# EAGLE board reefingBrd (EAGLE 9.6.2)
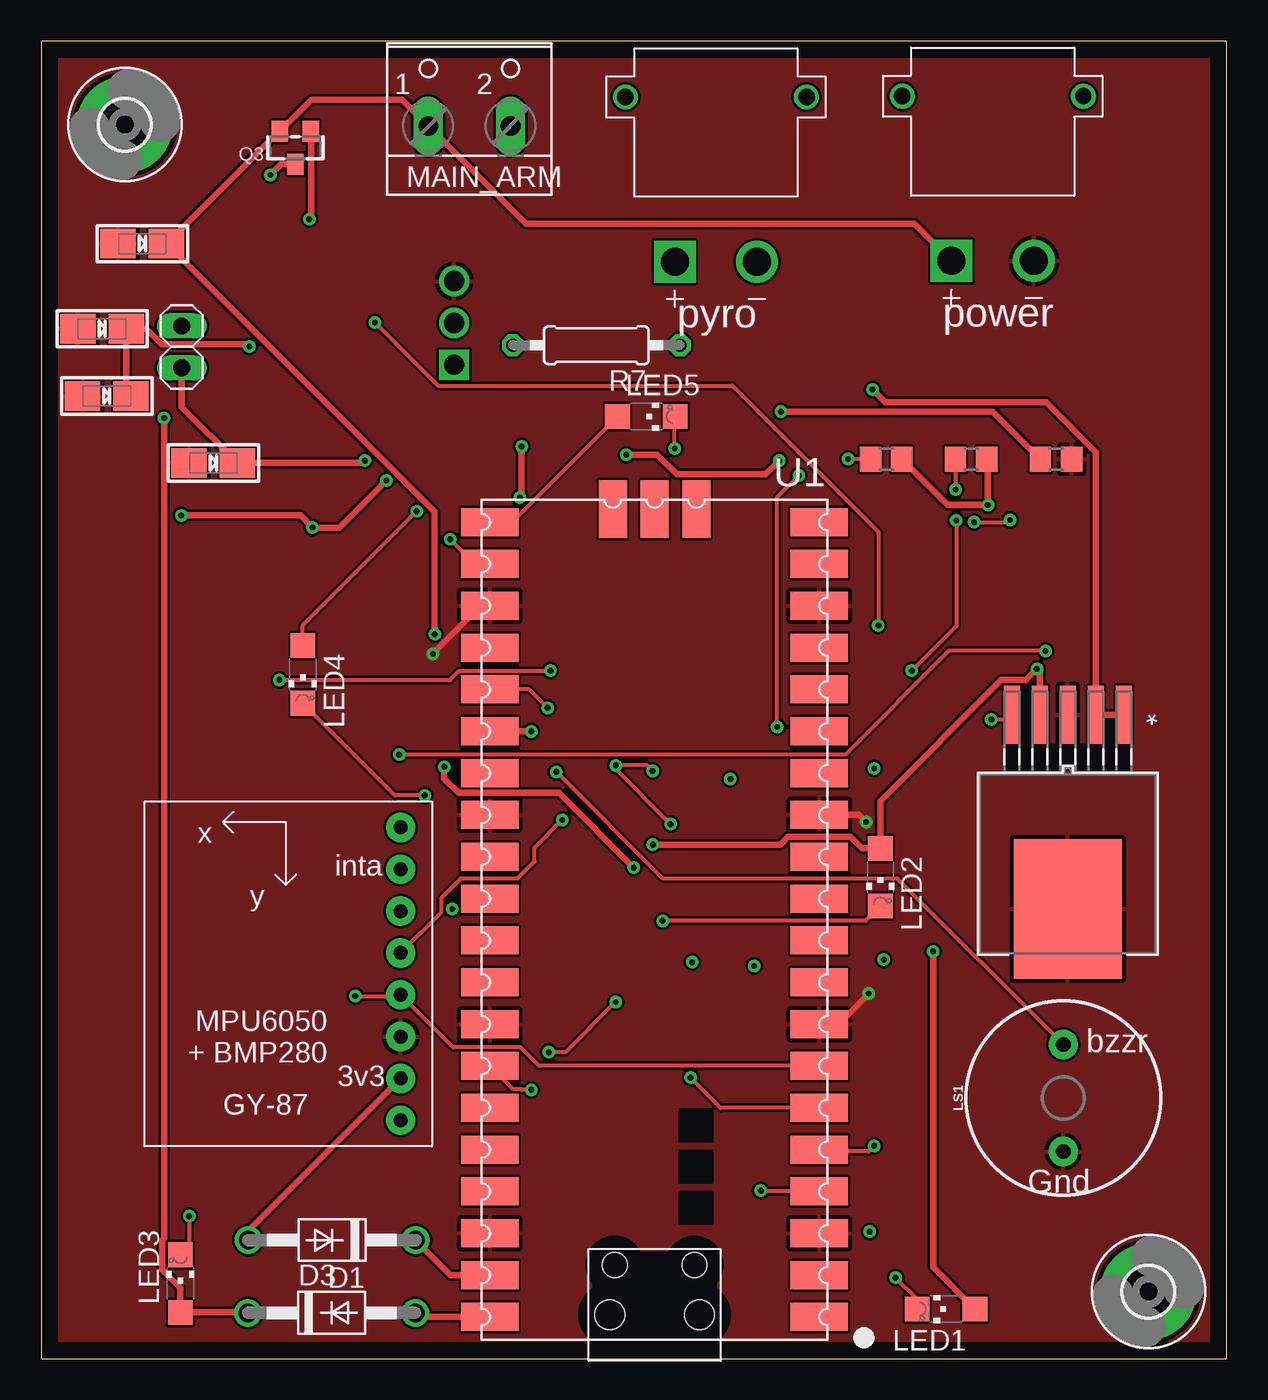
[diagram p0: board, top side]
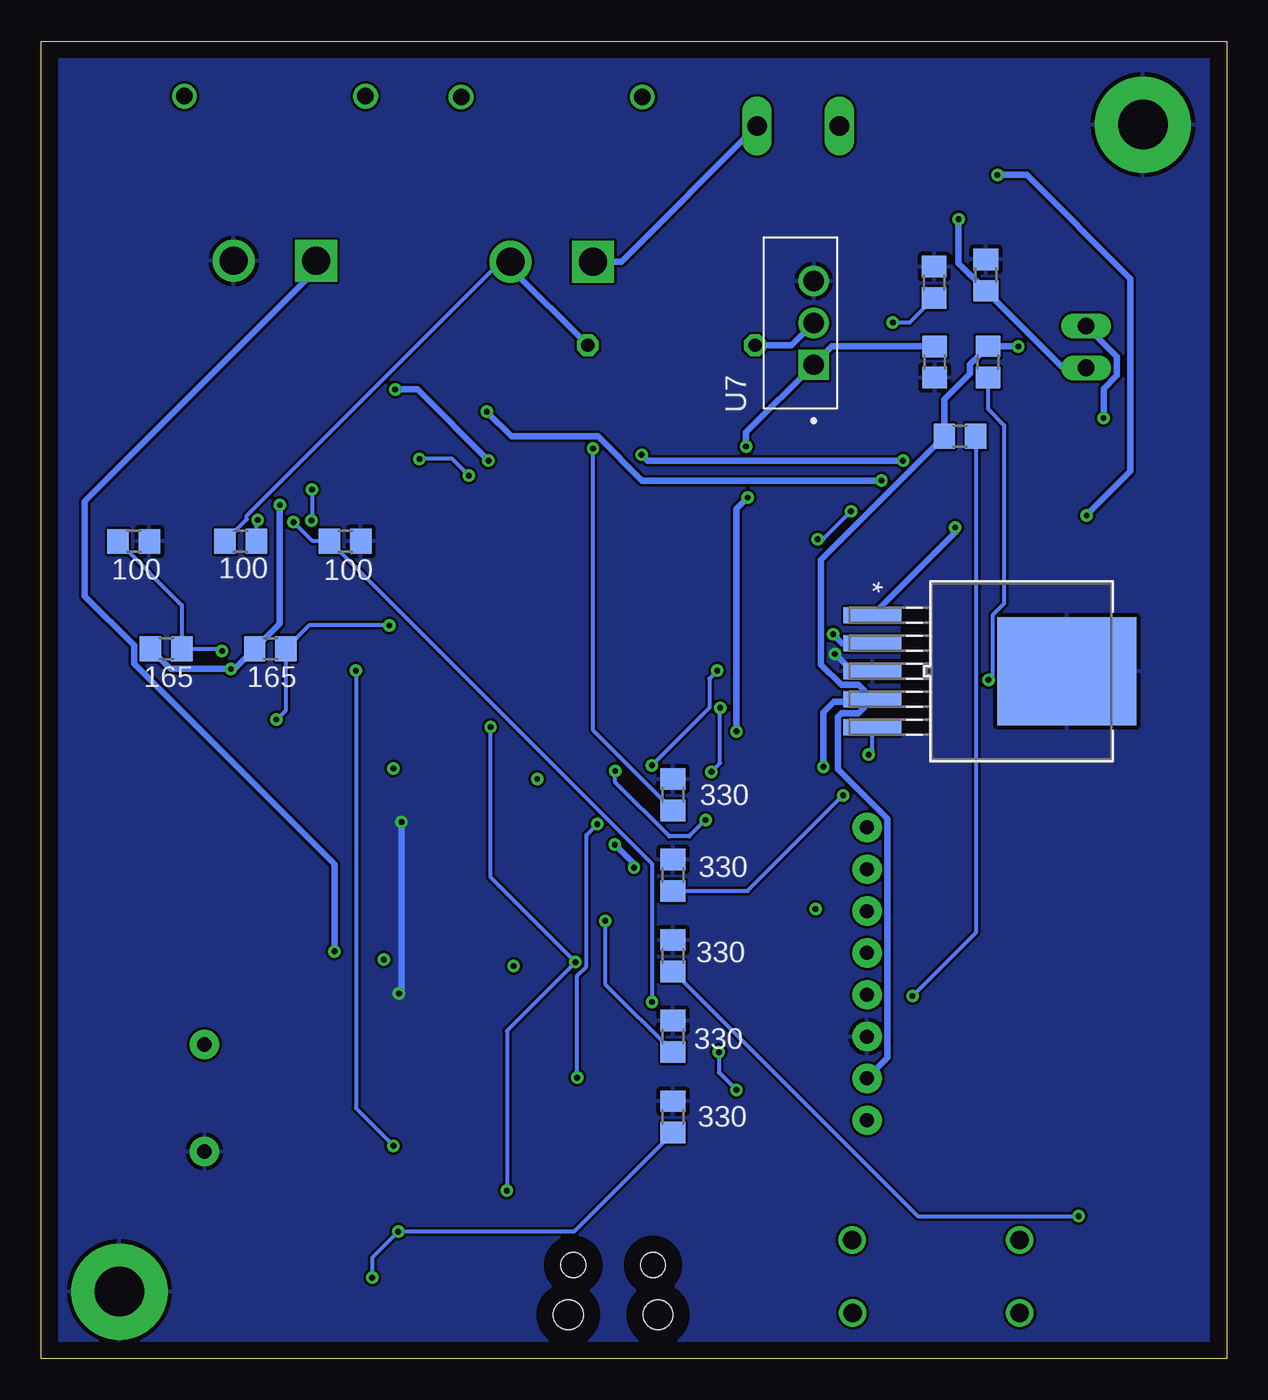
[diagram p1: board, bottom side, seen from below]

Size 72 x 80 mm. Coordinates in mm from the lower left corner, seen from the top.
Outline: 0,0 72,0 72,80 0,80 0,0
Copper layers (1*16): Top 0.035mm / dielectric 1.5mm / Bottom 0.035mm
Design rules "default": minimum track width 6mil, minimum drill 0.35mm, track to track 6mil, track to pad 6mil, pad to pad 6mil, via to via 6mil, smd to smd 6mil, copper to edge 40mil, drill to drill 6mil, minimum pad ring 10mil, minimum via ring 8mil, stop-mask expansion 4mil, vias tented up to drill 0mil, thermal gap 10mil

## Footprints (pad centres in the part's own frame; a part is rotated, then mirrored left to right if it is on the bottom)
EIA3216-18/A-W = smd 2.15 x 1.8: + 1.475,0; - -1.475,0
DO41-10 = drill 1.118: A 5.08,0; C -5.08,0
3,0-PAD = drill 3 pad 5.842: B3,0 0,0
1X02 = drill 1.016 long: 1 -1.27,0; 2 1.27,0
CHIPLED_1206 = smd 1.5 x 1.5: A 0,-1.75; C 0,1.75
BUZZER-12MM = drill 0.9 pad 1.778: + 3.25,0; - -3.25,0
W237-102 = drill 1.194 long: 1 -2.5,-1.27; 2 2.5,-1.27
AMASS_XT30PW-M = drill 1.7: N 2.5,-10 | drill 1.7 square: P -2.5,-10 | drill 1: S1 5.5,0; S2 -5.5,0
SOT23-WIDE = smd 1 x 1.27: 1 -0.95,-1; 2 0.95,-1; 3 0,1
R0805 = smd 1.3 x 1.5: 1 -0.95,0; 2 0.95,0
0207/10 = drill 0.813 octagon: 1 -5.08,0; 2 5.08,0
PICO-PKG-SMD = smd 3.5 x 1.7: P$1 -10,24.13; P$2 -10,21.59; P$3 -10,19.05; P$4 -10,16.51; P$5 -10,13.97; P$6 -10,11.43; P$7 -10,8.89; P$8 -10,6.35; P$9 -10,3.81; P$10 -10,1.27; P$11 -10,-1.27; P$12 -10,-3.81; P$13 -10,-6.35; P$14 -10,-8.89; P$15 -10,-11.43; P$16 -10,-13.97; P$17 -10,-16.51; P$18 -10,-19.05; P$19 -10,-21.59; P$20 -10,-24.13; P$21 10,-24.13; P$22 10,-21.59; P$23 10,-19.05; P$24 10,-16.51; P$25 10,-13.97; P$26 10,-11.43; P$27 10,-8.89; P$28 10,-6.35; P$29 10,-3.81; P$30 10,-1.27; P$31 10,1.27; P$32 10,3.81; P$33 10,6.35; P$34 10,8.89; P$35 10,11.43; P$36 10,13.97; P$37 10,16.51; P$38 10,19.05; P$39 10,21.59; P$40 10,24.13 | smd 1.7 x 3.5: P$41 -2.54,-24.925; P$42 0,-24.925; P$43 2.54,-24.925 | hole 1.8: -2.725,24; 2.725,24 | hole 1.5: -2.425,20.97; 2.425,20.97
GY-521 = drill 0.85 pad 1.778: 3V3 1.905,16.828; DRDY 1.905,1.587; FSYNC 1.905,6.668; GND 1.905,14.287; INTA 1.905,4.128; SCL 1.905,11.748; SDA 1.905,9.207; VCC_IN 1.905,19.367
TO-263-5_MCH = smd 0.965 x 3.505: 1 -3.404,-9.055; 2 -1.702,-9.055; 3 0,-9.055; 4 1.702,-9.055; 5 3.404,-9.055 | smd 6.553 x 8.458: 6 0,2.743
TO254P1054X469X1930-3 = drill 1.23 square: 1 -2.54,-0.81 | drill 1.23: 2 0,-0.81; 3 2.54,-0.81

## Placement (x,y rotation side)
C6  10uF  [EIA3216-18/A-W]  10.46,54.39 0 top
C7  10 uF  [EIA3216-18/A-W]  3.7,62.54 0 top
C11  10uF  [EIA3216-18/A-W]  6.15,67.71 0 top
C12  10 uF  [EIA3216-18/A-W]  3.99,58.45 0 top
D1  1N4004  [DO41-10]  17.66,7.21 180 top
D3  1N4004  [DO41-10]  17.64,2.79 0 top
H1  MOUNT-PAD-ROUND3.0  [3,0-PAD]  67.25,4.08 0 top
H2  MOUNT-PAD-ROUND3.0  [3,0-PAD]  5.08,74.93 0 top
JP1  [1X02]  8.54,61.44 90 top
LED1  [CHIPLED_1206]  54.96,3.02 90 top
LED2  [CHIPLED_1206]  50.97,29.24 180 top
LED3  [CHIPLED_1206]  8.46,4.57 0 top
LED4  [CHIPLED_1206]  15.89,41.55 180 top
LED5  [CHIPLED_1206]  36.76,57.21 270 top
LS1  BUZZER-PTH  [BUZZER-12MM]  62.08,15.84 90 top
MAIN_ARM  [W237-102]  26.01,76.13 0 top
POWER  XT30PW-M  [AMASS_XT30PW-M]  57.8,76.66 0 top
PYRO  XT30PW-M  [AMASS_XT30PW-M]  40.99,76.61 0 top
Q3  [SOT23-WIDE]  15.44,73.54 180 top
R1  4.7K ohm  [R0805]  14.49,60.53 270 bottom
R2  4.7K ohm  [R0805]  16.19,56.01 0 bottom
R3  4.7K ohm  [R0805]  51.32,54.62 180 top
R4  4.7K ohm  [R0805]  56.48,54.62 180 top
R5  100K  [R0805]  59.88,49.64 180 bottom
R6  4.7K  [R0805]  17.73,60.52 90 bottom
R7  10 ohm  [0207/10]  33.72,61.54 180 top
R8  100K  [R0805]  53.53,49.64 180 bottom
R9  330 ohm  [R0805]  33.62,14.69 270 bottom
R10  330 ohm  [R0805]  33.62,19.58 270 bottom
R11  330 ohm  [R0805]  33.62,24.47 270 bottom
R12  330 ohm  [R0805]  33.62,29.36 270 bottom
R13  330 ohm  [R0805]  33.62,34.25 270 bottom
R14  100K ohm  [R0805]  17.76,65.36 90 bottom
R15  165K ohm  [R0805]  58.08,43.11 0 bottom
R20  100K ohm  [R0805]  66.37,49.63 0 bottom
R21  165K ohm  [R0805]  64.4,43.11 0 bottom
R22  4.7K ohm  [R0805]  61.64,54.62 180 top
R24  4.7K ohm  [R0805]  14.62,65.8 270 bottom
U1  RASPBERRY_PICOSMD  [PICO-PKG-SMD]  37.26,26.67 180 top
U2  GY-521MPU6050  [GY-521]  23.74,33.85 180 top
U3  MIC29302WU-TR  [TO-263-5_MCH]  62.36,30.06 180 top
U4  MIC29302WU-TR  [TO-263-5_MCH]  12.45,41.75 270 bottom
U7  IRF540NPBF  [TO254P1054X469X1930-3]  25.89,62.89 90 bottom

## Library data of the parts
C6 C7 C11 C12 Q3 = microbuilder
D1 D3 = diode
H1 H2 = holes
JP1 = pinhead
LED1-LED5 = led
LS1 = SparkFun-Electromechanical; PROD_ID: COMP-08253; SF_SKU: COM-07950
MAIN_ARM = con-wago-500; MPN: 237-102; OC_FARNELL: unknown; OC_NEWARK: 70K9898
POWER PYRO = XT30PW-M; AVAILABILITY: Not in stock; CHECK_PRICES: https://www.snapeda.com/parts/XT30PW-M/AMASS/view-part/?ref=eda; DESCRIPTION: Socket; DC supply; XT30; male; PIN: 2; on PCBs; THT; Colour: yellow; MF: AMASS; MP: XT30PW-M; PACKAGE: None; PRICE: None; SNAPEDA_LINK: https://www.snapeda.com/parts/XT30PW-M/AMASS/view-part/?ref=snap
R1-R15 R20-R22 R24 = rcl; SPICEPREFIX: R
U1 = RpiPico
U2 = gy-87
U3 U4 = MIC29302WU; COPYRIGHT: Copyright (C) 2024 Ultra Librarian. All rights reserved.; MANUFACTURER_PART_NUMBER: MIC29302WU-TR; MFR_NAME: Microchip
U7 = IRF540NPBF; AVAILABILITY: In Stock; DESCRIPTION: RoHS Compliant | Low RDS(on) | Industry-leading quality | Dynamic dv/dt Rating | Fast Switching | Fully Avalanche Rated | 175C Operating Temperature; MF: Infineon; MP: IRF540NPBF; PACKAGE: TO-220 Infineon; PRICE: None; PURCHASE-URL: https://pricing.snapeda.com/search/part/IRF540NPBF/?ref=eda

## Nets
3V3: C7.+ C12.+ D1.A LED2.A R1.1 R2.1 R3.1 R4.1 R15.1 R21.1 U2.3V3 U3.4 U4.4
3V3(OUT): U1.P$36
BUZZER: LS1.+ U1.P$25
GND: C6.- C7.- C11.- C12.- H1.B3,0 H2.B3,0 LS1.- POWER.N R6.1 R8.1 R9.1 R10.1 R11.1 R12.1 R13.1 R14.2 R20.2 R22.1 R24.1 U1.P$3 U1.P$8 U1.P$13 U1.P$18 U1.P$23 U1.P$28 U1.P$33 U1.P$38 U2.GND U3.3 U3.6 U4.3 U4.6 U7.3
LED1: LED4.A U1.P$22
LED2: LED5.A U1.P$21
MAIN: R6.2 U1.P$26 U7.1
N$1: D1.C U1.P$39
N$2: D3.A U1.P$40
N$3: R20.1 R21.2 U4.5
N$4: PYRO.N R5.2 R7.1
N$5: R7.2 U7.2
N$6: MAIN_ARM.2 PYRO.P
N$10: R14.1 R15.2 U3.5
N$11: LED1.C R9.2
N$12: LED2.C R10.2
N$13: LED3.C R11.2
N$14: LED4.C R12.2
N$15: LED5.C R13.2
SCL0: R2.2 U1.P$7 U2.SCL
SCL1: R4.2 U1.P$5
SDA0: R1.2 U1.P$6 U2.SDA
SDA1: R3.2 U1.P$4
SENSE_MAIN: R5.1 R8.2 U1.P$34
SWGND: U1.P$42
VBUS: D3.C JP1.2 LED3.A
VBUS_REG: C6.+ JP1.1 Q3.1 R24.2 U3.1 U3.2
VCC: C11.+ LED1.A MAIN_ARM.1 POWER.P Q3.2 U4.2
VCC_EN: Q3.3 R22.2 U4.1

## Tracks (layer width: path | path; a pad name or v marks a point on that pad's centre or on a via)
3V3  (via drill 0.35)
  Top 0.406: U3.4 60.66,41.7 v60.48,41.88 59.81,41.22 58.33,41.22 50.97,33.86 LED2.A 49.85,30.99 49.16,31.69 45.36,31.69 44.89,31.22 v37.16,31.22 | R4.1 57.51,54.54 v57.51,51.84 55.05,51.84 R3.1 | C12.+ 5.18,58.73 C7.+ 6.37,62.54 7.32,61.59 12.53,61.59 v12.65,61.47 | D1.A 12.58,7.77 U2.3V3 | v35.99,29.82 31.46,34.35 25.36,34.35 24.49,35.23 v24.49,35.94
  Bottom 0.406: R21.1 64.46,42.21 64.13,41.88 v60.48,41.88 60.25,41.88 R15.1 58.14,44 57.51,44.64 v57.51,51.84 | v12.65,61.47 14.48,61.47 | 14.48,61.47 R1.1 | 14.48,61.47 15.36,60.59 15.39,60.59 15.6,60.38 15.6,59.8 17.14,58.26 R2.1 24.64,48.52 24.64,42.14 23.41,40.91 22.37,40.91 U4.4 21.81,39.74 | 21.81,39.74 22.37,39.19 23.41,39.19 23.61,38.98 23.61,35.8 20.59,32.78 20.59,18.27 U2.3V3 | v37.16,31.22 35.99,30.05 v35.99,29.82 | v24.49,35.94 24.49,39.27 23.85,39.9 21.97,39.9 21.81,39.74
BUZZER  (via drill 0.35)
  Top 0.254: LS1.+ 52.01,29.16 37.77,29.16 v31.29,35.64 | v30.76,39.52 29.64,40.64 U1.P$25
  Bottom 0.254: v31.29,35.64 30.76,36.17 v30.76,39.52
GND  (via drill 0.35)
  Top 0.406: v23.79,42.8 25.15,44.16 25.15,44.18 26.7,45.72 U1.P$23 | U1.P$8 48.41,20.32 v50.27,22.17 | v50.11,32.59 49.68,33.02 U1.P$13
  Bottom 0.406: U4.3 22.74,41.75 v23.79,42.8 | v50.27,22.17 50.11,22.33 v50.11,32.59
  pour Top: 0,0 71.98,0 72.03,-0.05 72.03,79.98 71.98,80.04 0.05,80.04 0.03,80.01 -0.03,79.96 -0.03,0
  pour Bottom: 0.03,-0.03 71.98,-0.03 72.01,0 72.01,79.98 71.98,80.01 0.03,80.01 -0.03,79.96 -0.03,0.03
LED1  (via drill 0.35)
  Top 0.254: LED4.A 15.89,44.54 v22.81,51.46 | v24.84,49.76 26.34,48.26 U1.P$22
  Bottom 0.254: v22.81,51.46 24.51,49.76 v24.84,49.76
LED2
  Top 0.254: U1.P$21 28.6,50.8 LED5.A
MAIN  (via drill 0.35)
  Top 0.406: v29.18,55.4 29.18,52.4 v29.08,52.3 | v29.77,38.1 U1.P$26
  Bottom 0.406: R6.2 23.96,61.47 U7.1 29.18,56.25 v29.18,55.4 | v29.08,52.3 29.77,51.61 v29.77,38.1
N$1
  Top 0.406: U1.P$39 24.87,5.08 D1.C
N$2
  Top 0.406: D3.A 22.97,2.54 U1.P$40
N$3  (via drill 0.35)
  Top 0.254: v61.01,42.98 55.13,42.98 48.84,36.69 21.75,36.69 v21.74,36.68
  Bottom 0.254: R20.1 63.45,45.76 R21.2 61.14,43.11 v61.01,42.98 | v21.74,36.68 21.5,36.91 U4.5
N$4
  Bottom 0.254: R5.2 59.51,50.97 59.51,51.2 44.1,66.61 PYRO.N
  Bottom 0.406: R7.1 43.49,66.23 PYRO.N
N$5
  Bottom 0.406: R7.2 26.43,61.54 U7.2
N$6
  Bottom 0.406: MAIN_ARM.2 36.76,66.61 PYRO.P
N$7  (via drill 0.35)
  other vias: 43.31,23.85
N$8  (via drill 0.35)
  other vias: 51.18,24.23
N$9  (via drill 0.35)
  other vias: 41.86,35.2
N$10  (via drill 0.35)
  Top 0.254: v20.27,62.92 24.11,59.08 41.98,59.08 50.85,50.2 v50.85,44.53 | U3.5 58.66,38.81 v57.71,38.81
  Bottom 0.254: R14.1 19.25,62.92 v20.27,62.92 | v50.85,44.53 55.71,44.53 R15.2 57.13,39.39 v57.71,38.81
N$11  (via drill 0.35)
  Top 0.254: v51.89,4.93 53.21,3.61 LED1.C
  Bottom 0.254: R9.2 39.64,7.72 v50.32,7.72 51.89,6.15 v51.89,4.93
N$12  (via drill 0.35)
  Top 0.254: LED2.C 50.07,26.59 v37.74,26.59
  Bottom 0.254: v37.74,26.59 37.74,22.75 R10.2
N$13  (via drill 0.35)
  Top 0.254: v8.99,8.66 8.99,6.85 LED3.C
  Bottom 0.254: R11.2 18.76,8.66 v8.99,8.66
N$14  (via drill 0.35)
  Top 0.254: v23.29,34.21 21.48,34.21 LED4.C
  Bottom 0.254: R12.2 29.1,28.41 v23.29,34.21
N$15  (via drill 0.35)
  Top 0.254: v38.48,55.27 38.48,57.18 LED5.C
  Bottom 0.254: R13.2 38.48,38.16 v38.48,55.27
N$16  (via drill 0.35)
  other vias: 24.97,27.3
N$17  (via drill 0.35)
  other vias: 50.6,35.84
SCL0  (via drill 0.35)
  Top 0.254: v19.07,22.02 21.75,22.02 U2.SCL 25.03,18.91 29.13,18.91 30.25,17.78 U1.P$7
  Bottom 0.254: R2.2 15.24,25.86 v19.07,22.02
SCL1  (via drill 0.35)
  Top 0.254: R4.2 55.53,52.8 v55.55,52.78 | v55.58,50.9 55.58,44.48 v52.88,41.78 | v50.6,12.93 50.27,12.6 46.53,12.6 46.63,12.7 U1.P$5
  Bottom 0.254: v55.55,52.78 55.55,50.93 v55.58,50.9 | v52.88,41.78 52.88,15.21 v50.6,12.93
SDA0  (via drill 0.35)
  Top 0.254: U1.P$6 41.27,15.24 v39.45,17.07 | v38.23,32.46 34.9,35.79 v34.9,36.03 36.79,36.03 v37.13,35.69 | v14.47,41.22 24.85,41.22 25.39,41.77 30.92,41.77 v30.94,41.78 | U2.SDA 24.31,27.12 24.31,27.99 25.5,29.17 28.95,29.17 29.98,30.2 29.98,31.04 v31.65,32.72
  Bottom 0.254: v39.45,17.07 39.45,23.25 38.89,23.81 38.89,31.8 v38.23,32.46 | v34.9,36.03 31.42,39.52 31.42,41.3 v30.94,41.78 | R1.2 14.49,57.67 13.51,56.69 13.51,45.84 14.21,45.14 14.21,41.48 v14.47,41.22 | v31.65,32.72 32.64,31.73 33.84,31.73 37.13,35.02 v37.13,35.69
SDA1  (via drill 0.35)
  Top 0.254: v43.71,10.21 47.21,10.21 U1.P$4 | v44.7,38.35 44.7,52.3 v46.02,53.62 | v49.02,54.63 50.35,54.63 R3.2
  Bottom 0.254: v43.71,10.21 43.71,19.91 v39.55,24.08 44.7,29.23 v44.7,38.35 | v46.02,53.62 47.04,54.63 v49.02,54.63
SENSE_MAIN  (via drill 0.35)
  Top 0.254: v56.67,50.8 58.65,50.8 58.78,50.93 v58.85,50.93 | v34.9,21.67 31.85,18.62 v30.84,18.62 | v29.77,16.33 29.16,16.33 29.13,16.37 28.67,16.37 U1.P$34
  Bottom 0.254: v56.67,50.8 55.51,49.64 R8.2 34.9,30.06 v34.9,21.67 | v58.85,50.93 58.93,50.84 R5.1 | v30.84,18.62 30.84,17.4 v29.77,16.33
VBUS  (via drill 0.35)
  Top 0.406: D3.C 12.53,2.82 LED3.A 8.46,4.31 7.35,5.42 7.35,7.21 7.47,7.33 v7.47,57.12
  Bottom 0.406: v7.47,57.12 7.47,58.9 6.66,59.71 6.66,60.83 JP1.2
VBUS_REG  (via drill 0.35)
  Top 0.406: Q3.1 16.39,69.3 v16.28,69.19 | JP1.1 8.54,57.78 C6.+ 19.52,54.39 v19.66,54.53 | v35.53,54.89 37.41,54.89 38.61,53.7 38.8,53.7 44,53.7 v44.83,54.53 | v50.49,58.85 51.28,58.06 61.05,58.06 64.07,55.05 U3.2 U3.1
  Bottom 0.406: v16.28,69.19 16.28,66.51 15.52,65.74 15.51,65.74 R24.2 9.94,60.17 JP1.1 | v19.66,54.53 35.18,54.53 v35.53,54.89 | v44.83,54.53 49.15,58.85 v50.49,58.85
VCC  (via drill 0.35)
  Top 0.406: v23.9,43.99 23.9,51.43 C11.+ 14.45,74.53 Q3.2 16.41,76.45 21.91,76.45 MAIN_ARM.1 29.46,68.91 53.05,68.91 POWER.P | LED1.A 54.18,5.55 v54.18,24.74
  Bottom 0.406: v23.9,43.99 23.36,43.45 U4.2 | v54.18,24.74 54.18,30.03 66.36,42.21 66.36,43.32 69.34,46.3 69.34,52.07 55.27,66.14 55.27,66.63 POWER.P
VCC_EN  (via drill 0.35)
  Top 0.406: v8.51,51.21 15.75,51.21 v16.48,50.47 18.11,50.47 v20.96,53.33 | v13.92,71.88 14.57,72.53 Q3.3 | R22.2 57.8,57.51 v44.93,57.51
  Bottom 0.406: U4.1 16.48,50.17 v16.48,50.47 | v8.51,51.21 5.84,53.87 5.84,65.58 12.14,71.88 v13.92,71.88 | v44.93,57.51 43.43,56 38.18,56 35.5,53.33 v20.96,53.33

## Text on the board
tNames: pyro | power | inta | bzzr | 3v3 | Gnd
bNames: 100 | 100 | 100 | 165 | 165 | 330 | 330 | 330 | 330 | 330
tValues: 10 | 100 | 4.7 | 10 | 4.7 | 4.7 | 10 | 4.7 | 4.7 | 4.7 | 10 | 4.7 | vcc | vcc